# EAGLE board MP3_8xMulti_V1.0 (EAGLE 9.6.2)
AUTHORS: by Hardi, Jürgen & Dominik; DATE: 21.12.2021; LINK: https://wiki.mobaledlib.de/redirect/p502; PROJECT: 502_8xSound; VERSION: Ver. 1.0
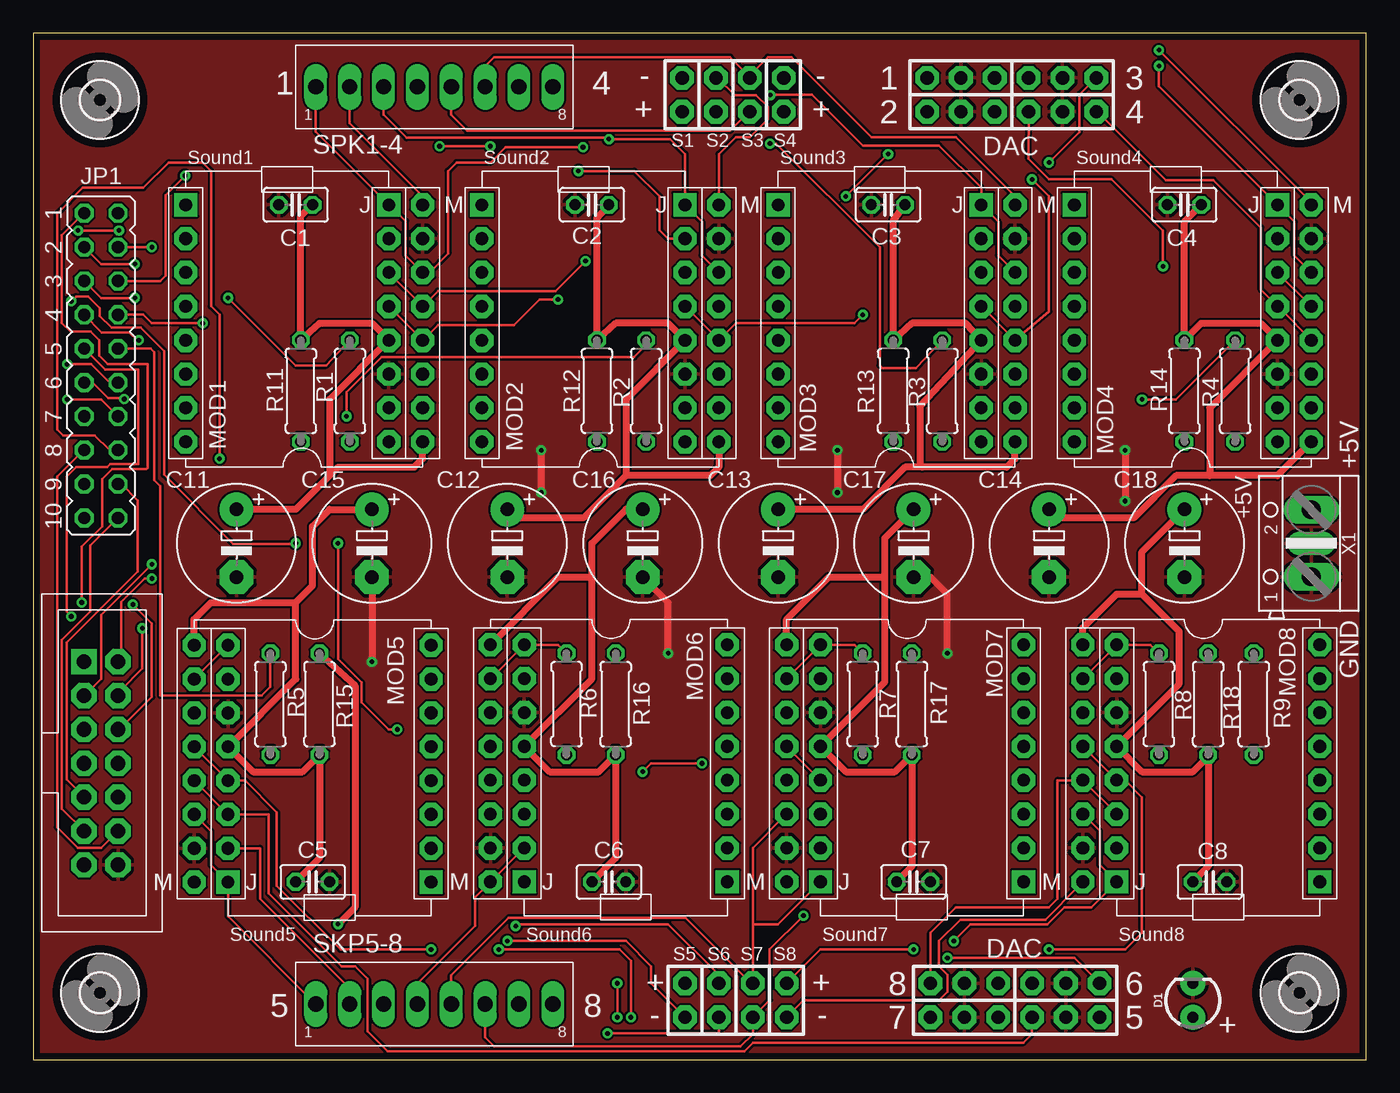
[diagram p0: board, top side]
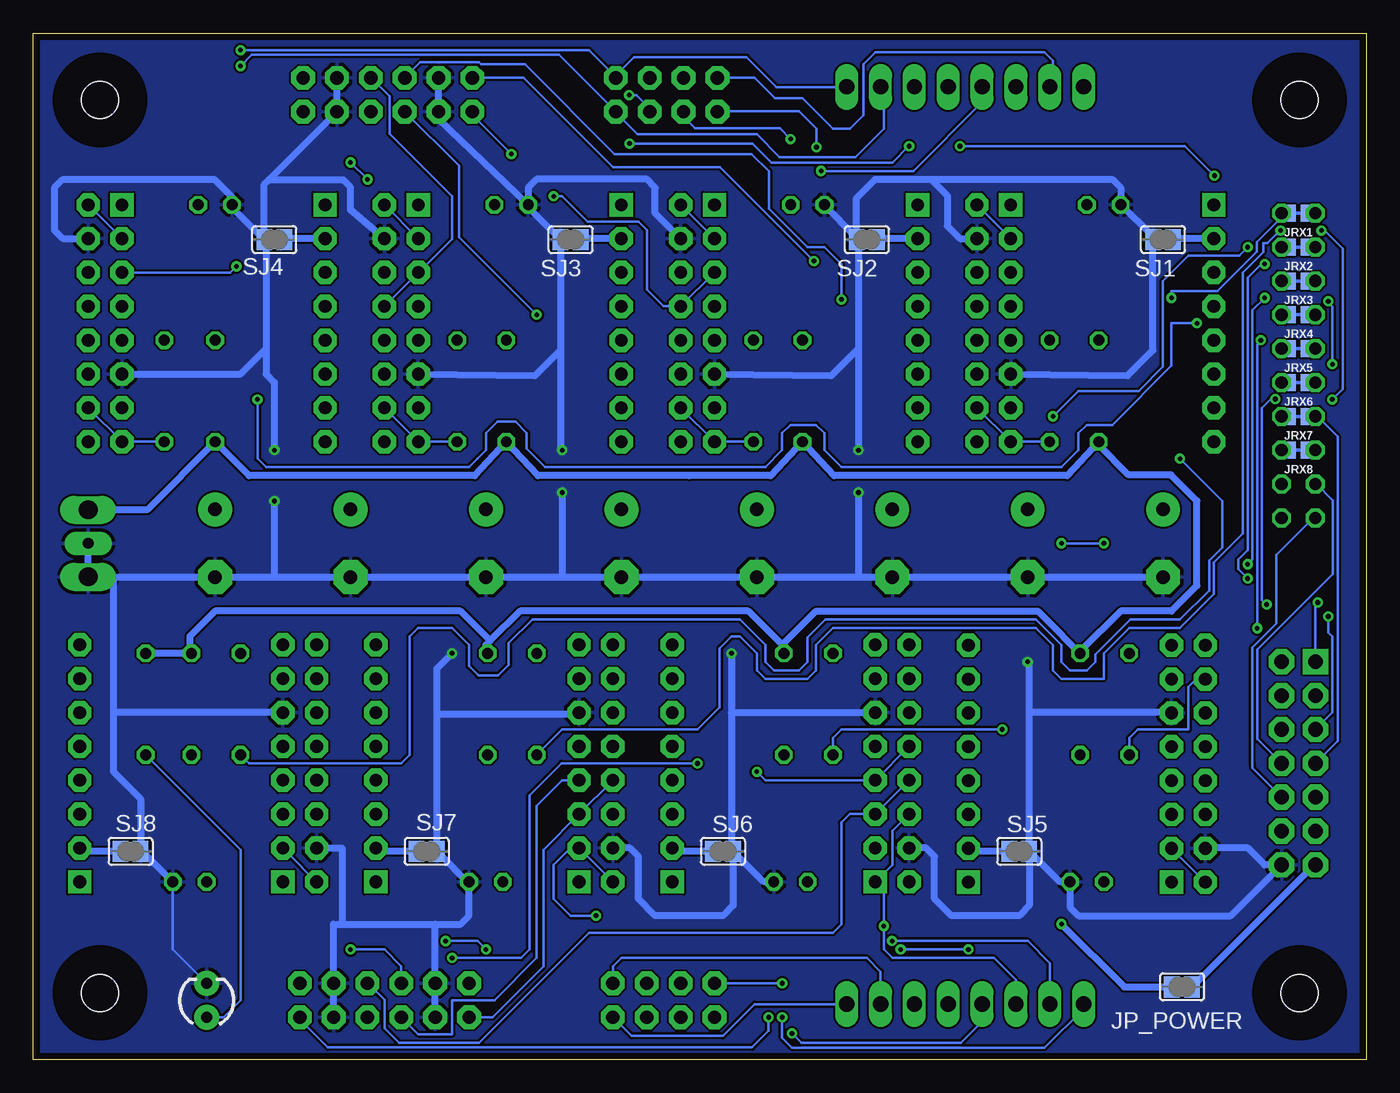
[diagram p1: board, bottom side, seen from below]

Size 100 x 77 mm. Coordinates in mm from the lower left corner, seen from the top.
Outline: 0,0 100,0 100,77 0,77 0,0
Copper layers (1*16): Top 0.035mm / dielectric 1.5mm / Bottom 0.035mm
Design rules "default *": minimum track width 8mil, minimum drill 0.35mm, track to track 6mil, track to pad 6mil, pad to pad 6mil, via to via 6mil, smd to smd 6mil, copper to edge 20mil, drill to drill 6mil, minimum pad ring 10mil, minimum via ring 8mil, stop-mask expansion 4mil, vias tented up to drill 16mil, thermal gap 10mil

## Footprints (pad centres in the part's own frame; a part is rotated, then mirrored left to right if it is on the bottom)
C025-025X050 = drill 0.813 octagon: 1 -1.27,0; 2 1.27,0
E5-8,5 = drill 1.016 pad 2.54: + -2.54,0 | drill 1.016 pad 2.54 octagon: - 2.54,0
LED_3MM = drill 0.813 pad 1.88: A -1.27,0; K 1.27,0
3XRM254 = drill 1 pad 1.778 octagon: P$1 0,6.35; P$2 0,3.81; P$3 0,1.27
2,8 = hole 2.8: 0,0
JP10Q = drill 0.914 octagon: 1 -11.43,-1.27; 2 -11.43,1.27; 3 -8.89,-1.27; 4 -8.89,1.27; 5 -6.35,-1.27; 6 -6.35,1.27; 7 -3.81,-1.27; 8 -3.81,1.27; 9 -1.27,-1.27; 10 -1.27,1.27; 11 1.27,-1.27; 12 1.27,1.27; 13 3.81,-1.27; 14 3.81,1.27; 15 6.35,-1.27; 16 6.35,1.27; 17 8.89,-1.27; 18 8.89,1.27; 19 11.43,-1.27; 20 11.43,1.27
SJ = smd 1.168 x 1.6: 1 -0.762,0; 2 0.762,0
SMT-JUMPER_2_NC_TRACE_NO-SILK = smd 0.635 x 1.27: 1 -0.508,0; 2 0.508,0
IDC14 = drill 1.1 pad 1.9 square: 1 -7.62,-1.27 | drill 1.1 pad 1.9 octagon: 2 -7.62,1.27; 3 -5.08,-1.27; 4 -5.08,1.27; 5 -2.54,-1.27; 6 -2.54,1.27; 7 0,-1.27; 8 0,1.27; 9 2.54,-1.27; 10 2.54,1.27; 11 5.08,-1.27; 12 5.08,1.27; 13 7.62,-1.27; 14 7.62,1.27
MP3-TF16P_JQ6500 = drill 0.95 pad 1.75 octagon: J_DACL 5.08,2.54; J_DACR 5.08,0; J_GND1 5.08,-5.08; J_RX 5.08,-10.16; J_SPK- 5.08,5.08; J_TX 5.08,-7.62; J_VCC 5.08,-2.54; M_DACL 7.62,0; M_DACR 7.62,-2.54; M_GND1 7.62,5.08; M_GND2 -10.16,5.08; M_RX 7.62,-7.62; M_SPK1 7.62,2.54; M_SPK2 7.62,7.62; M_TX 7.62,-5.08; M_VCC 7.62,-10.16; MUSB+ -10.16,-5.08; MUSB- -10.16,-7.62; P$3 -10.16,2.54; P$4 -10.16,0; P$5 -10.16,-2.54; P$8 -10.16,-10.16 | drill 0.95 pad 1.75 square: J_SPK+ 5.08,7.62; P$1 -10.16,7.62
0207/7 = drill 0.813 octagon: 1 -3.81,0; 2 3.81,0
DG308 = drill 1.15 pad 1.676 long: P$1 1.51,3.14; P$2 4.05,3.14; P$3 6.59,3.14; P$4 9.13,3.14; P$5 11.67,3.14; P$6 14.21,3.14; P$7 16.75,3.14; P$8 19.29,3.14
2XRM254 = drill 1 pad 1.778 octagon: P$1 0,3.81; P$2 0,1.27
AK500/2+M = drill 1.397 long: 1 -2.515,0; 2 2.515,0 | drill 0.813 pad 1.778 long: M 0,0

## Placement (x,y rotation side)
C1  100nF  [C025-025X050]  19.68,64.14 180 top
C2  100nF  [C025-025X050]  41.91,64.14 180 top
C3  100nF  [C025-025X050]  64.14,64.14 180 top
C4  100nF  [C025-025X050]  86.36,64.14 180 top
C5  100nF  [C025-025X050]  20.95,13.34 0 top
C6  100nF  [C025-025X050]  43.18,13.34 0 top
C7  100nF  [C025-025X050]  66.04,13.34 0 top
C8  100nF  [C025-025X050]  88.27,13.34 0 top
C11  470µF  [E5-8,5]  15.24,38.73 270 top
C12  470µF  [E5-8,5]  35.56,38.73 270 top
C13  470µF  [E5-8,5]  55.88,38.73 270 top
C14  470µF  [E5-8,5]  76.2,38.73 270 top
C15  470µF  [E5-8,5]  25.4,38.73 270 top
C16  470µF  [E5-8,5]  45.72,38.73 270 top
C17  470µF  [E5-8,5]  66.04,38.73 270 top
C18  470µF  [E5-8,5]  86.36,38.73 270 top
D1  [LED_3MM]  87,4.45 90 top
DAC1  3XRM254  [3XRM254]  73.41,73.66 90 top
DAC2  3XRM254  [3XRM254]  73.41,71.12 90 top
DAC3  3XRM254  [3XRM254]  81.03,73.66 90 top
DAC4  3XRM254  [3XRM254]  81.03,71.12 90 top
DAC5  3XRM254  [3XRM254]  81.28,3.17 90 top
DAC6  3XRM254  [3XRM254]  81.28,5.71 90 top
DAC7  3XRM254  [3XRM254]  73.66,3.17 90 top
DAC8  3XRM254  [3XRM254]  73.66,5.71 90 top
H1  MOUNT-HOLE2.8  [2,8]  5,5 0 top
H2  MOUNT-HOLE2.8  [2,8]  95,5 0 top
H3  MOUNT-HOLE2.8  [2,8]  5,72 0 top
H4  MOUNT-HOLE2.8  [2,8]  95,72 0 top
JP1  [JP10Q]  5.08,52.07 270 top
JP_POWER  [SJ]  13.82,5.45 180 bottom
JRX1  JUMPER-SMT_2_NC_TRACE_NO-SILK  [SMT-JUMPER_2_NC_TRACE_NO-SILK]  5.08,63.5 180 bottom
JRX2  JUMPER-SMT_2_NC_TRACE_NO-SILK  [SMT-JUMPER_2_NC_TRACE_NO-SILK]  5.08,60.96 180 bottom
JRX3  JUMPER-SMT_2_NC_TRACE_NO-SILK  [SMT-JUMPER_2_NC_TRACE_NO-SILK]  5.08,58.42 180 bottom
JRX4  JUMPER-SMT_2_NC_TRACE_NO-SILK  [SMT-JUMPER_2_NC_TRACE_NO-SILK]  5.08,55.88 180 bottom
JRX5  JUMPER-SMT_2_NC_TRACE_NO-SILK  [SMT-JUMPER_2_NC_TRACE_NO-SILK]  5.08,53.34 180 bottom
JRX6  JUMPER-SMT_2_NC_TRACE_NO-SILK  [SMT-JUMPER_2_NC_TRACE_NO-SILK]  5.08,50.8 180 bottom
JRX7  JUMPER-SMT_2_NC_TRACE_NO-SILK  [SMT-JUMPER_2_NC_TRACE_NO-SILK]  5.08,48.26 180 bottom
JRX8  JUMPER-SMT_2_NC_TRACE_NO-SILK  [SMT-JUMPER_2_NC_TRACE_NO-SILK]  5.08,45.72 180 bottom
KEY80  KEY_80  [IDC14]  5.08,22.23 270 top
MOD1  MP3-MULTI  [MP3-TF16P_JQ6500]  21.59,56.52 0 top
MOD2  MP3-MULTI  [MP3-TF16P_JQ6500]  43.81,56.52 0 top
MOD3  MP3-MULTI  [MP3-TF16P_JQ6500]  66.04,56.52 0 top
MOD4  MP3-MULTI  [MP3-TF16P_JQ6500]  88.27,56.52 0 top
MOD5  MP3-MULTI  [MP3-TF16P_JQ6500]  19.68,20.93 180 top
MOD6  MP3-MULTI  [MP3-TF16P_JQ6500]  41.91,20.95 180 top
MOD7  MP3-MULTI  [MP3-TF16P_JQ6500]  64.14,20.95 180 top
MOD8  MP3-MULTI  [MP3-TF16P_JQ6500]  86.36,20.95 180 top
R1  1K  [0207/7]  23.75,50.16 270 top
R2  1K  [0207/7]  45.97,50.16 270 top
R3  1K  [0207/7]  68.2,50.16 270 top
R4  1K  [0207/7]  90.17,50.16 270 top
R5  1K  [0207/7]  17.78,26.67 270 top
R6  1K  [0207/7]  40.01,26.67 90 top
R7  1K  [0207/7]  62.23,26.67 90 top
R8  1K  [0207/7]  84.45,26.67 90 top
R9  470R  [0207/7]  91.57,26.67 270 top
R11  1R  [0207/7]  20.07,50.16 270 top
R12  1R  [0207/7]  42.29,50.16 90 top
R13  1R  [0207/7]  64.52,50.16 90 top
R14  1R  [0207/7]  86.36,50.16 90 top
R15  1R  [0207/7]  21.46,26.67 270 top
R16  1R  [0207/7]  43.69,26.67 270 top
R17  1R  [0207/7]  65.91,26.67 270 top
R18  1R  [0207/7]  88.14,26.67 270 top
SJ1  [SJ]  15.24,61.52 0 bottom
SJ2  [SJ]  37.47,61.52 0 bottom
SJ3  [SJ]  59.69,61.52 0 bottom
SJ4  [SJ]  81.92,61.52 0 bottom
SJ5  [SJ]  26.04,15.62 180 bottom
SJ6  [SJ]  48.26,15.62 180 bottom
SJ7  [SJ]  70.48,15.62 180 bottom
SJ8  [SJ]  92.71,15.62 180 bottom
SKP5-8  4X2P-OUT  [DG308]  19.68,1.02 0 top
SPK1  2XRM254  [2XRM254]  48.68,74.93 180 top
SPK1-4  4X2P-OUT  [DG308]  19.68,69.85 0 top
SPK2  2XRM254  [2XRM254]  51.22,74.93 180 top
SPK3  2XRM254  [2XRM254]  53.75,74.93 180 top
SPK4  2XRM254  [2XRM254]  56.29,74.93 180 top
SPK5  2XRM254  [2XRM254]  48.9,1.91 0 top
SPK6  2XRM254  [2XRM254]  51.44,1.91 0 top
SPK7  2XRM254  [2XRM254]  53.98,1.91 0 top
SPK8  2XRM254  [2XRM254]  56.52,1.91 0 top
X1  AK500/2+M  [AK500/2+M]  95.89,38.73 90 top

## Library data of the parts
C1-C8 C11-C18 = rcl; SPICEPREFIX: C
D1 = SparkFun-LED; PROD_ID: DIO-08794
DAC1-DAC8 KEY80 MOD1-MOD8 SKP5-8 SPK1 SPK1-4 SPK2-SPK8 = MLL-Dominik-Hardi
H1-H4 = holes
JP1 JP_POWER SJ1-SJ8 = jumper
JRX1-JRX8 = SparkFun-Jumpers
R1-R9 R11-R18 = rcl; SPICEPREFIX: R
X1 = Arduino_fuer_LEDs_DCC_2

## Nets
+5V: JP_POWER.2 R9.1 R11.2 R12.1 R13.1 R14.1 R15.1 R16.1 R17.1 R18.1 X1.2
A1: JP1.17 KEY80.8
BUT: JP1.18 KEY80.9
D2: JP1.1 JRX1.1 KEY80.1
D7: JP1.3 JRX2.1 KEY80.2
D8: JP1.5 JRX3.1 KEY80.3
D9: JP1.7 JRX4.1 KEY80.4
D10: JP1.9 JRX5.1 KEY80.5
D11: JP1.11 JRX6.1 KEY80.6
D12: JP1.13 JRX7.1 KEY80.7
DACL_S1: DAC1.P$1 MOD1.J_DACL MOD1.M_DACL
DACL_S2: DAC2.P$1 MOD2.J_DACL MOD2.M_DACL
DACL_S3: DAC3.P$1 MOD3.J_DACL MOD3.M_DACL
DACL_S4: DAC4.P$1 MOD4.J_DACL MOD4.M_DACL
DACL_S5: DAC5.P$1 MOD5.J_DACL MOD5.M_DACL
DACL_S6: DAC6.P$1 MOD6.J_DACL MOD6.M_DACL
DACL_S7: DAC7.P$1 MOD7.J_DACL MOD7.M_DACL
DACL_S8: DAC8.P$1 MOD8.J_DACL MOD8.M_DACL
DACR_S1: DAC1.P$3 MOD1.J_DACR MOD1.M_DACR
DACR_S2: DAC2.P$3 MOD2.J_DACR MOD2.M_DACR
DACR_S3: DAC3.P$3 MOD3.J_DACR MOD3.M_DACR
DACR_S4: DAC4.P$3 MOD4.J_DACR MOD4.M_DACR
DACR_S5: DAC5.P$3 MOD5.J_DACR MOD5.M_DACR
DACR_S6: DAC6.P$3 MOD6.J_DACR MOD6.M_DACR
DACR_S7: DAC7.P$3 MOD7.J_DACR MOD7.M_DACR
DACR_S8: DAC8.P$3 MOD8.J_DACR MOD8.M_DACR
GND: C1.2 C2.2 C3.2 C4.2 C5.2 C6.2 C7.2 C8.2 C11.- C12.- C13.- C14.- C15.- C16.- C17.- C18.- D1.K DAC1.P$2 DAC2.P$2 DAC3.P$2 DAC4.P$2 DAC5.P$2 DAC6.P$2 DAC7.P$2 DAC8.P$2 KEY80.14 MOD1.J_GND1 MOD1.M_GND1 MOD2.J_GND1 MOD2.M_GND1 MOD3.J_GND1 MOD3.M_GND1 MOD4.J_GND1 MOD4.M_GND1 MOD5.J_GND1 MOD5.M_GND1 MOD6.J_GND1 MOD6.M_GND1 MOD7.J_GND1 MOD7.M_GND1 MOD8.J_GND1 MOD8.M_GND1 SJ1.1 SJ2.1 SJ3.1 SJ4.1 SJ5.1 SJ6.1 SJ7.1 SJ8.1 X1.1 X1.M
LED1: D1.A R9.2
M_GND1: MOD1.M_GND2 SJ1.2
M_GND2: MOD2.M_GND2 SJ2.2
M_GND3: MOD3.M_GND2 SJ3.2
M_GND4: MOD4.M_GND2 SJ4.2
M_GND5: MOD5.M_GND2 SJ5.2
M_GND6: MOD6.M_GND2 SJ6.2
M_GND7: MOD7.M_GND2 SJ7.2
M_GND8: MOD8.M_GND2 SJ8.2
MOD1_RX: MOD1.J_RX MOD1.M_RX R1.2
MOD1_RX1: MOD2.J_RX MOD2.M_RX R2.2
MOD1_RX2: MOD3.J_RX MOD3.M_RX R3.2
MOD1_RX3: MOD4.J_RX MOD4.M_RX R4.2
MOD1_RX4: MOD5.J_RX MOD5.M_RX R5.2
MOD1_RX5: MOD6.J_RX MOD6.M_RX R6.2
MOD1_RX6: MOD7.J_RX MOD7.M_RX R7.2
MOD1_RX7: MOD8.J_RX MOD8.M_RX R8.2
OPT-VCC: JP_POWER.1 KEY80.13
RES: JP1.19 KEY80.10
RX1: JP1.2 JRX1.2 R1.1
RX2: JP1.4 JRX2.2 R2.1
RX3: JP1.6 JRX3.2 R3.1
RX4: JP1.8 JRX4.2 R4.1
RX5: JP1.10 JRX5.2 R5.1
RX6: JP1.12 JRX6.2 R6.1
RX7: JP1.14 JRX7.2 R7.1
RX8: JP1.16 JRX8.2 R8.1
SCL: JP1.15 JRX8.1 KEY80.12
SDA: JP1.20 KEY80.11
SOUND1_VCC: C1.1 C11.+ MOD1.J_VCC MOD1.M_VCC R11.1
SOUND2_VCC: C2.1 C12.+ MOD2.J_VCC MOD2.M_VCC R12.2
SOUND3_VCC: C3.1 C13.+ MOD3.J_VCC MOD3.M_VCC R13.2
SOUND4_VCC: C4.1 C14.+ MOD4.J_VCC MOD4.M_VCC R14.2
SOUND5_VCC: C5.1 C15.+ MOD5.J_VCC MOD5.M_VCC R15.2
SOUND6_VCC: C6.1 C16.+ MOD6.J_VCC MOD6.M_VCC R16.2
SOUND7_VCC: C7.1 C17.+ MOD7.J_VCC MOD7.M_VCC R17.2
SOUND8_VCC: C8.1 C18.+ MOD8.J_VCC MOD8.M_VCC R18.2
SPK_S1+: MOD1.J_SPK+ MOD1.M_SPK1 SPK1-4.P$1 SPK1.P$1
SPK_S1-: MOD1.J_SPK- MOD1.M_SPK2 SPK1-4.P$2 SPK1.P$2
SPK_S2+: MOD2.J_SPK+ MOD2.M_SPK1 SPK1-4.P$3 SPK2.P$1
SPK_S2-: MOD2.J_SPK- MOD2.M_SPK2 SPK1-4.P$4 SPK2.P$2
SPK_S3+: MOD3.J_SPK+ MOD3.M_SPK1 SPK1-4.P$5 SPK3.P$1
SPK_S3-: MOD3.J_SPK- MOD3.M_SPK2 SPK1-4.P$6 SPK3.P$2
SPK_S4+: MOD4.J_SPK+ MOD4.M_SPK1 SPK1-4.P$7 SPK4.P$1
SPK_S4-: MOD4.J_SPK- MOD4.M_SPK2 SPK1-4.P$8 SPK4.P$2
SPK_S5+: MOD5.J_SPK+ MOD5.M_SPK1 SKP5-8.P$1 SPK5.P$1
SPK_S5-: MOD5.J_SPK- MOD5.M_SPK2 SKP5-8.P$2 SPK5.P$2
SPK_S6+: MOD6.J_SPK+ MOD6.M_SPK1 SKP5-8.P$3 SPK6.P$1
SPK_S6-: MOD6.J_SPK- MOD6.M_SPK2 SKP5-8.P$4 SPK6.P$2
SPK_S7+: MOD7.J_SPK+ MOD7.M_SPK1 SKP5-8.P$5 SPK7.P$1
SPK_S7-: MOD7.J_SPK- MOD7.M_SPK2 SKP5-8.P$6 SPK7.P$2
SPK_S8+: MOD8.J_SPK+ MOD8.M_SPK1 SKP5-8.P$7 SPK8.P$1
SPK_S8-: MOD8.J_SPK- MOD8.M_SPK2 SKP5-8.P$8 SPK8.P$2

## Tracks (layer width: path | path; a pad name or v marks a point on that pad's centre or on a via)
+5V  (via drill 0.35)
  Top 0.508: R15.1 24.13,28.07 24.13,11.43 v22.86,10.16
  Bottom 0.508: v22.86,10.16 18.15,5.45 JP_POWER.2 | 65.72,31.43 63.5,33.66 46.35,33.66 43.69,30.99 R16.1 43.69,31.24 41.27,33.66 24.64,33.66 24.07,33.08 R15.1 21.46,30.61 18.41,33.66 14.61,33.66 12.7,35.56 12.7,41.91 14.66,43.87 17.83,43.87 20.07,46.1 R11.2 22.44,43.81 39.92,43.81 R12.1 44.66,43.81 50.8,43.81 62.15,43.81 R13.1 66.89,43.81 83.82,43.81 R14.1 91.47,41.25 X1.2 | 65.72,31.43 66.04,31.11 66.04,30.61 R17.1 | 65.72,31.43 67.94,33.66 86.36,33.66 88.27,31.75 88.27,30.61 R18.1 R9.1
A1
  Bottom 0.203: JP1.17 3.73,43.2 2.49,41.96 2.49,36.45 8.18,30.76 8.18,24.05 KEY80.8
BUT
  Top 0.203: JP1.18 6.58,43.2 7.82,41.96 7.82,36.63 2.49,31.29 2.49,21.01 KEY80.9
D2  (via drill 0.35)
  Top 0.203: JP1.1 3.73,63.48 2.13,61.87 2.13,55.27 2.79,54.61 4.32,54.61 4.95,53.98 4.95,52.83 5.59,52.2 8.56,52.2 8.56,44.4 8.48,44.31 5.91,44.31 5.16,43.56 5.16,40.01 3.63,38.48 v3.63,34.29
  Bottom 0.203: JRX1.1 JP1.1 | KEY80.1 3.81,34.29 v3.63,34.29
D7  (via drill 0.35)
  Top 0.203: v8.89,36.09 8.36,36.09 6.58,34.31 6.58,30.23 KEY80.2 | v7.62,59.69 5.08,59.69 JP1.3
  Bottom 0.203: v8.89,36.09 9.6,36.8 9.6,37.52 8.89,38.23 8.89,58.67 7.87,59.69 v7.62,59.69 | JRX2.1 JP1.3
D8  (via drill 0.35)
  Top 0.203: v8.89,37.16 5.08,33.35 5.08,28.57 KEY80.3 | JP1.5 5.08,57.15 v7.62,57.15
  Bottom 0.203: v8.89,37.16 8.53,37.52 8.53,56.24 v7.62,57.15 | JRX3.1 JP1.5
D9  (via drill 0.35)
  Top 0.203: v8.18,32.36 8.18,29.34 6.58,27.74 KEY80.4 | v7.9,53.98 7.78,53.98 7.21,54.55 5.14,54.55 JP1.7
  Bottom 0.203: v7.9,53.98 8.18,53.7 v8.18,32.36 | JRX4.1 JP1.7
D10  (via drill 0.35)
  Top 0.203: v2.85,33.25 2.49,33.6 2.49,43.74 3.2,44.45 5.54,44.45 5.76,44.67 7.87,44.67 7.87,51.77 5.38,51.77 JP1.9
  Bottom 0.203: JRX5.1 JP1.9 | v2.85,33.25 2.85,32.05 2.54,31.75 2.54,26.04 KEY80.5
D11  (via drill 0.35)
  Top 0.203: v7.47,34.14 8.89,32.72 8.89,27.2 6.76,25.07 KEY80.6 | v6.81,49.56 6.81,49.63 5.61,49.63 4.45,50.8 JP1.11
  Bottom 0.203: v7.47,34.14 7.82,34.49 7.82,48.9 7.16,49.56 v6.81,49.56 | JRX6.1 JP1.11
D12
  Bottom 0.203: KEY80.7 2.13,23.9 2.13,46.76 3.63,48.26 JP1.13 JRX7.1
DACL_S1  (via drill 0.35)
  Top 0.203: v41.43,59.92 39.17,57.66 30.35,57.66 MOD1.M_DACL MOD1.J_DACL
  Bottom 0.203: v41.43,59.92 48.46,66.95 56.52,66.95 63.22,73.66 DAC1.P$1
DACL_S2  (via drill 0.35)
  Top 0.203: v60.96,64.77 v64.14,67.94
  Bottom 0.203: DAC2.P$1 67.03,71.12 67.03,70.84 v64.14,67.94 | MOD2.J_DACL MOD2.M_DACL 52.7,56.52 53.98,57.78 53.98,62.23 54.61,62.87 58.42,62.87 60.33,64.77 v60.96,64.77
DACL_S3
  Bottom 0.203: DAC3.P$1 73.28,72.29 73.28,69.47 68.58,64.77 68.58,61.57 71.09,59.05 MOD3.J_DACL MOD3.M_DACL
DACL_S4  (via drill 0.35)
  Top 0.203: v84.76,59.51 84.76,62.18 80.9,66.04 76.2,66.04 74.66,67.58 DAC4.P$1 | MOD4.M_DACL MOD4.J_DACL
  Bottom 0.203: MOD4.J_DACL 85.22,59.05 v84.76,59.51
DACL_S5
  Top 0.203: MOD5.M_DACL 14.59,18.4 | 14.59,18.4 MOD5.J_DACL | 14.59,18.4 17.65,18.4 17.65,12.47 23.14,6.99 24.13,6.99 25.07,6.04 25.07,2.13 26.57,0.64 53.34,0.64 53.98,1.27 74.3,1.27 74.93,1.91 DAC5.P$1
DACL_S6
  Bottom 0.203: DAC6.P$1 74.85,5.69 73.66,4.5 73.66,2.36 72.57,1.27 66.55,1.27 58.29,9.53 40.01,9.53 39.37,10.16 39.37,17.78 38.73,18.41 MOD6.J_DACL MOD6.M_DACL
DACL_S7
  Bottom 0.203: DAC7.P$1 65.53,3.17 61.72,6.99 61.72,15.75 MOD7.J_DACL MOD7.M_DACL
DACL_S8
  Top 0.203: MOD8.J_DACL MOD8.M_DACL 76.83,20.95 76.83,12.06 76.2,11.43 69.22,11.43 67.31,9.53 DAC8.P$1
DACR_S1  (via drill 0.35)
  Top 0.203: v39.37,57.03 37.98,57.03 36.07,55.12 30.35,55.12 MOD1.M_DACR MOD1.J_DACR
  Bottom 0.203: DAC1.P$3 70.98,74.82 66.57,74.82 66.42,74.68 63.12,74.68 56.39,67.94 46.1,67.94 44.81,66.65 44.81,63.86 41.91,60.96 40.64,60.96 39.37,59.69 v39.37,57.03
DACR_S2  (via drill 0.35)
  Top 0.203: MOD2.J_DACR MOD2.M_DACR 52.7,55.24 61.59,55.24 v62.23,55.88
  Bottom 0.203: DAC2.P$3 68.07,67.09 68.07,61.72 v62.23,55.88
DACR_S3  (via drill 0.35)
  Top 0.203: DAC3.P$3 78.47,72.41 78.47,69.58 v76.2,67.31 | v74.93,66.04 76.2,64.77 76.2,56.13 MOD3.M_DACR MOD3.J_DACR
  Bottom 0.203: v74.93,66.04 v76.2,67.31
DACR_S4
  Top 0.203: 93.52,56.36 96.01,53.87 MOD4.M_DACR | 93.52,56.36 92.1,57.78 92.1,62.43 88.54,65.99 84.96,65.99 79.83,71.12 DAC4.P$3 | 93.52,56.36 MOD4.J_DACR
DACR_S5  (via drill 0.35)
  Top 0.203: v29.84,8.26 23.04,8.26 18.26,13.03 18.26,18.54 15.88,20.93 MOD5.J_DACR MOD5.M_DACR | v34.92,8.26 43.97,8.26 44.83,7.39 v44.83,3.17
  Bottom 0.203: DAC5.P$3 80.01,3.02 77.9,0.91 46.08,0.91 44.83,2.16 v44.83,3.17 | v29.84,8.26 v34.92,8.26
DACR_S6  (via drill 0.35)
  Top 0.203: v68.58,7.62 78.11,7.62 DAC6.P$3 | v50.16,22.23 46.35,22.23 v45.72,21.59
  Bottom 0.203: v68.58,7.62 63.4,7.62 62.76,8.26 62.76,19.84 60.38,22.23 v50.16,22.23 | MOD6.M_DACR MOD6.J_DACR 45.09,20.95 v45.72,21.59
DACR_S7
  Top 0.203: MOD7.J_DACR MOD7.M_DACR
  Bottom 0.203: DAC7.P$3 71.12,1.91 68.58,1.91 68.58,4.45 65.41,4.45 62.23,7.62 62.23,19.05 60.33,20.95 MOD7.J_DACR
DACR_S8  (via drill 0.35)
  Top 0.203: v76.2,8.26 81.92,8.26 83.19,9.53 83.19,19.68 81.92,20.95 MOD8.J_DACR MOD8.M_DACR
  Bottom 0.203: DAC8.P$3 72.39,6.99 73.66,8.26 v76.2,8.26
GND  (via drill 0.35)
  Top 0.508: C15.- v25.4,29.84 | v68.58,30.48 68.58,34.92 67.31,36.2 C17.- | v38.1,45.72 v38.1,42.55 | v60.33,45.72 v60.33,42.55 | v81.92,45.72 v81.92,41.91 | C16.- 47.62,34.29 v47.62,30.48
  Bottom 0.203: D1.K 89.53,8.26 C8.2
  Bottom 0.508: 82.55,53.34 82.55,61.39 SJ4.1 | MOD3.J_GND1 62.36,51.31 60.45,53.21 | 60.45,53.21 SJ3.1 62.93,64 C3.2 | MOD2.J_GND1 40.13,51.31 38.1,53.34 | 38.1,53.34 38.1,61.39 SJ2.1 | SJ2.1 38.23,61.62 C2.2 | MOD1.J_GND1 17.91,51.31 16,53.21 SJ1.1 16,61.77 C1.2 18.41,65.41 19.05,66.04 32.64,66.04 | 69.72,25.91 SJ7.1 67.22,13.12 C7.2 67.31,10.79 67.94,10.16 69.85,10.16 | 69.72,25.91 58.99,25.91 MOD7.J_GND1 | 76.83,10.16 69.85,10.16 | 69.72,25.91 69.72,29.34 v68.58,30.48 | 93.98,26.04 93.98,21.59 91.95,19.56 SJ8.1 91.82,15.62 C8.2 | SJ5.1 25.27,26.04 | 25.27,26.04 25.27,29.72 v25.4,29.84 | DAC7.P$2 DAC8.P$2 69.85,10.16 | DAC5.P$2 DAC6.P$2 77.47,10.16 76.83,10.16 | SJ4.1 82.68,65.67 82.35,65.99 | 82.35,65.99 79.89,68.46 DAC4.P$2 DAC3.P$2 | C3.2 69.58,70.55 DAC2.P$2 DAC1.P$2 | MOD3.M_GND1 76.2,63.75 76.2,65.46 76.74,65.99 82.35,65.99 | SJ2.1 38.23,64.64 36.83,66.04 32.64,66.04 | 32.64,66.04 31.42,64.82 31.42,62.53 30.48,61.59 MOD1.M_GND1 | MOD8.M_GND1 76.83,15.88 76.83,10.16 | SJ4.1 85.09,63.93 C4.2 85.09,64.72 86.39,66.02 97.81,66.02 98.42,65.41 98.42,62.23 97.79,61.59 MOD4.M_GND1 | MOD4.J_GND1 84.45,51.44 82.55,53.34 | MOD8.J_GND1 93.98,26.04 | SJ6.1 47.5,11.56 48.26,10.79 53.34,10.79 54.61,12.06 54.61,15.24 55.24,15.88 MOD7.M_GND1 | SJ5.1 25.27,11.56 26.04,10.79 31.11,10.79 32.38,12.06 32.38,15.24 33.02,15.88 MOD6.M_GND1 | MOD5.M_GND1 12.04,15.88 8.89,15.88 7.62,14.61 KEY80.14 10.16,10.79 21.59,10.79 22.23,11.43 C5.2 22.99,13.34 SJ5.1 | MOD5.J_GND1 14.63,26.04 25.27,26.04 | v47.62,30.48 47.62,26.04 | 47.62,26.04 MOD6.J_GND1 | 47.62,26.04 47.62,15.75 SJ6.1 | MOD2.M_GND1 53.34,63.5 53.34,65.41 53.98,66.04 62.23,66.04 62.87,65.41 C3.2
  Bottom 0.508: C6.2 45.21,13.34 SJ6.1 | 93.98,36.22 86.39,36.22 C18.- 81.92,36.2 | 81.92,36.2 C14.- C17.- 60.33,36.2 | 60.33,36.2 C13.- C16.- 38.1,36.2 | 38.1,36.2 C12.- C15.- C11.- | 38.1,53.34 v38.1,45.72 | 60.45,53.21 60.45,45.85 v60.33,45.72 | v60.33,42.55 60.33,36.2 | 82.55,53.34 82.55,51.44 81.92,50.8 v81.92,45.72 | v81.92,41.91 81.92,36.2 | X1.M X1.1 93.98,36.22 | 93.98,26.04 93.98,36.22 | v38.1,42.55 38.1,36.2
  pour Bottom: 0.08,76.89 100,76.89 100,0 0.08,0
  pour Top: 0.21,76.92 100,76.92 100,0 0,0 0.13,0.81 0.13,76.84
LED1
  Bottom 0.203: D1.A 85.72,3.17 84.45,4.45 84.45,15.75 R9.2
M_GND1
  Bottom 0.508: MOD1.M_GND2 14.4,61.59 SJ1.2
M_GND2
  Bottom 0.508: MOD2.M_GND2 36.63,61.59 SJ2.2
M_GND3
  Bottom 0.508: MOD3.M_GND2 58.85,61.59 SJ3.2
M_GND4
  Bottom 0.203: SJ4.2 81.05,61.52
  Bottom 0.508: MOD4.M_GND2 80.97,61.59 81.05,61.52
M_GND5
  Bottom 0.508: SJ5.2 29.62,15.62 MOD5.M_GND2
M_GND6
  Bottom 0.508: SJ6.2 51.82,15.62 MOD6.M_GND2
M_GND7
  Bottom 0.508: SJ7.2 74.04,15.62 MOD7.M_GND2
M_GND8
  Bottom 0.508: SJ8.2 96.27,15.62 MOD8.M_GND2
MOD1_RX
  Bottom 0.203: R1.2 MOD1.J_RX MOD1.M_RX
MOD1_RX1
  Bottom 0.203: R2.2 MOD2.J_RX MOD2.M_RX
MOD1_RX2
  Bottom 0.203: MOD3.M_RX MOD3.J_RX R3.2
MOD1_RX3
  Bottom 0.203: R4.2 MOD4.J_RX MOD4.M_RX
MOD1_RX4
  Top 0.203: MOD5.J_RX MOD5.M_RX
  Bottom 0.203: MOD5.M_RX 12.72,28.55 13.34,27.94 13.34,24.77 17.14,24.77 17.78,24.13 R5.2
MOD1_RX5
  Top 0.203: MOD6.M_RX MOD6.J_RX 39.37,31.11 R6.2
MOD1_RX6
  Top 0.203: MOD7.M_RX MOD7.J_RX 61.59,31.11 R7.2
MOD1_RX7
  Top 0.203: MOD8.M_RX MOD8.J_RX 83.82,31.11 R8.2
OPT-VCC
  Bottom 0.508: JP_POWER.1 4.04,14.46 KEY80.13
RES
  Bottom 0.203: JP1.19 3.91,40.72 6.76,37.87 6.76,32.72 8.53,30.94 8.53,22.23 8.53,22.05 8.53,21.87 KEY80.10
RX1  (via drill 0.35)
  Top 0.203: v14.61,57.15 19.68,52.07 21.97,52.07 R1.1
  Bottom 0.203: JRX1.2 JP1.2 6.58,63.48 6.58,62.94 8.2,61.32 8.2,60.63 11.18,57.66 14.61,57.66 v14.61,57.15
RX2  (via drill 0.35)
  Top 0.203: v23.5,48.26 23.5,50.08 26.12,52.7 45.09,52.7 45.97,53.59 R2.1 | v8.89,60.96 JP1.4
  Bottom 0.203: v23.5,48.26 21.59,50.16 17.06,50.16 15.24,51.99 15.24,58.42 13.34,60.33 9.53,60.33 v8.89,60.96 | JRX2.2 JP1.4
RX3  (via drill 0.35)
  Top 0.203: R3.1 66.23,51.88 63.69,51.88 63.5,52.07 63.5,60.96 55.73,68.73 v55.27,68.73 | v11.38,66.32 9.93,64.87 9.93,58.83 9.53,58.42 JP1.6 | v34.29,68.53 30.53,68.53 30.48,68.58 v30.48,68.53
  Bottom 0.203: v55.27,68.73 46.05,68.73 44.63,67.31 35.56,67.31 34.29,68.58 v34.29,68.53 | v30.48,68.53 13.59,68.53 v11.38,66.32 | JRX3.2 JP1.6
RX4  (via drill 0.35)
  Top 0.203: R4.1 85.72,49.53 v83.19,49.53 | v12.7,55.24 8.89,55.24 8.26,55.88 JP1.8
  Bottom 0.203: v83.19,49.53 83.19,45.09 82.55,44.45 67.31,44.45 66.67,45.09 66.04,45.72 66.04,46.99 65.18,47.85 63.83,47.85 62.99,47.02 62.99,45.85 61.59,44.45 45.09,44.45 43.81,45.72 43.81,46.99 43.18,47.62 41.27,47.62 40.64,46.99 40.64,45.72 39.37,44.45 22.86,44.45 21.59,45.72 21.59,46.99 20.95,47.62 19.05,47.62 14.61,52.07 14.61,55.24 v12.7,55.24 | JRX4.2 JP1.8
RX5
  Top 0.203: JP1.10 8.81,53.34 9.07,53.09 9.07,43.49 9.53,43.03 9.53,27.3 17.14,27.3 17.78,27.94 R5.1
  Bottom 0.203: JRX5.2 JP1.10
RX6  (via drill 0.35)
  Top 0.203: v2.85,56.9 3.2,57.25 4.13,57.25 5,56.38 5,55.79 5.89,54.9 8.06,54.9 9.8,53.16 9.8,43.89 15.01,38.68 19.63,38.68 v19.68,38.73 | JP1.12 5.71,50.8 4.35,52.17 v2.53,52.17 | v22.86,38.73 22.86,30.07 24.65,28.28 24.65,26.79 26.67,24.77 v27.3,24.77
  Bottom 0.203: v2.85,56.9 2.85,56.82 2.53,56.51 v2.53,52.17 | R6.1 40.01,24.13 39.37,24.77 v27.3,24.77 | JRX6.2 JP1.12 | v22.86,38.73 v19.68,38.73
RX7  (via drill 0.35)
  Top 0.203: JP1.14 5.08,49.53 v2.54,49.53 | v3.35,62.2 6.22,62.2 v6.42,62.2
  Bottom 0.203: JRX7.2 JP1.14 | v2.54,49.53 1.75,50.32 1.75,60.86 3.1,62.2 v3.35,62.2 | R7.1 60.33,24.77 50.16,24.77 48.51,26.42 48.51,30.86 47.62,31.75 46.99,31.75 45.72,30.48 45.72,29.21 45.09,28.57 41.91,28.57 41.27,29.21 41.27,31.11 40.01,32.38 24.77,32.38 23.5,31.11 23.5,29.21 22.86,28.57 19.68,28.57 19.68,30.48 17.78,32.38 13.97,32.38 11.43,34.92 11.43,37.29 9.25,39.47 9.25,59.05 7.72,60.58 7.72,61.27 7.41,61.27 6.75,61.92 6.7,61.92 v6.42,62.2
RX8  (via drill 0.35)
  Top 0.203: v13.97,45.09 13.97,55.88 13.34,56.52 13.34,66.67 12.7,67.31 10.16,67.31 8.26,65.41 3.71,65.41 1.78,63.48 1.78,47.27 2.23,46.82 4.62,46.82 5.71,45.72 JP1.16
  Bottom 0.203: v13.97,45.09 10.79,41.91 10.79,38.42 11.79,37.43 11.79,35.2 13.97,33.02 17.7,33.02 20.32,30.4 20.32,29.84 20.95,29.21 22.23,29.21 22.86,29.84 22.86,31.11 24.77,33.02 40.56,33.02 41.91,31.67 41.91,29.84 42.55,29.21 44.45,29.21 45.09,29.84 45.09,31.11 46.99,33.02 62.56,33.02 64.34,31.24 64.34,29.59 65.13,28.8 66.6,28.8 67.31,29.52 67.31,31.11 68.58,32.38 71.12,32.38 71.75,31.75 71.75,22.86 72.39,22.23 83.82,22.23 R8.1 | JRX8.2 JP1.16
SCL
  Top 0.203: JP1.15 3.73,45.7 1.78,43.74 1.78,17.42 3.33,15.88 5.08,15.88 KEY80.12
  Bottom 0.203: JRX8.1 JP1.15
SDA
  Top 0.203: JP1.20 6.4,40.72 4.27,38.58 4.27,33.6 2.13,31.47 2.13,18.82 KEY80.11
SOUND1_VCC
  Top 0.508: C1.1 20.07,63.3 R11.1 21.46,55.24 25.4,55.24 MOD1.J_VCC 22.23,49.53 22.23,43.81 | 22.23,43.81 19.68,41.27 C11.+ | 22.23,43.81 22.86,44.45 28.57,44.45 29.21,45.09 MOD1.M_VCC
SOUND2_VCC
  Top 0.508: C2.1 42.29,63.14 R12.2 43.69,55.24 47.62,55.24 MOD2.J_VCC 44.45,49.53 44.45,43.81 | MOD2.M_VCC 51.44,44.45 50.8,43.81 44.45,43.81 | 44.45,43.81 41.27,40.64 36.2,40.64 C12.+
SOUND3_VCC
  Top 0.508: C3.1 64.52,62.94 R13.2 65.91,55.24 69.94,55.24 MOD3.J_VCC 66.52,49.04 66.52,44.61 66.67,44.45 | MOD3.M_VCC 73.66,45.09 73.03,44.45 66.67,44.45 | C13.+ 62.23,41.27 65.41,44.45 66.67,44.45
SOUND4_VCC
  Top 0.508: C4.1 86.36,62.87 R14.2 87.63,55.24 92.08,55.24 MOD4.J_VCC 88.27,48.9 88.27,43.81 | 88.27,43.81 93.34,43.81 MOD4.M_VCC | 88.27,43.81 85.72,43.81 82.55,40.64 76.83,40.64 C14.+
SOUND5_VCC
  Top 0.508: MOD5.M_VCC 12.06,33.02 13.34,34.29 19.68,34.29 | 19.68,34.29 19.68,28.55 MOD5.J_VCC 16.48,21.59 20.19,21.59 R15.2 21.46,15.11 C5.1 | 19.68,34.29 20.95,35.56 20.95,40.01 22.23,41.27 C15.+
SOUND6_VCC
  Top 0.508: MOD6.M_VCC 39.37,36.2 41.91,36.2 | 41.91,36.2 41.91,28.57 MOD6.J_VCC 38.73,21.59 42.42,21.59 R16.2 43.69,15.11 C6.1 | 41.91,36.2 41.91,38.73 44.45,41.27 C16.+
SOUND7_VCC
  Top 0.508: MOD7.M_VCC 56.52,33.02 59.69,36.2 63.88,36.2 | 63.88,36.2 63.88,28.32 MOD7.J_VCC 60.96,21.59 64.64,21.59 R17.2 65.91,14.48 C7.1 | 63.88,36.2 63.88,39.12 C17.+
SOUND8_VCC
  Top 0.508: C8.1 88.14,14.48 R18.2 88.14,22.73 87,21.59 83.19,21.59 MOD8.J_VCC 85.98,28.19 85.98,32.13 83.19,34.92 | C18.+ 83.19,38.1 83.19,34.92 | MOD8.M_VCC 78.74,32.38 81.28,34.92 83.19,34.92
SPK_S1+  (via drill 0.35)
  Top 0.203: v41.25,68.45 35.43,68.45 34.29,67.31 31.75,67.31 31.11,66.67 31.11,60.45 29.72,59.05 MOD1.M_SPK1 27.94,60.33 27.94,62.92 26.72,64.14 MOD1.J_SPK+ 21.2,69.61 SPK1-4.P$1
  Bottom 0.203: v41.25,68.45 41.25,69.85 42.57,71.17 48.64,71.17 SPK1.P$1
SPK_S1-
  Top 0.203: SPK1-4.P$2 23.73,70.25 29.21,64.77 MOD1.M_SPK2
  Bottom 0.203: SPK1.P$2 45.88,73.66 44.36,72.14 42.29,72.14 40.01,69.85 38.73,69.85 37.72,70.87 37.72,74.68 36.83,75.56 24.13,75.56 23.5,74.93 23.5,73.23 SPK1-4.P$2 | MOD1.J_SPK- 27.94,62.87 MOD1.M_SPK2
SPK_S2+  (via drill 0.35)
  Top 0.203: MOD2.M_SPK1 50.16,60.33 50.16,62.87 MOD2.J_SPK+ 48.9,67.94 47.78,69.06 v43.18,69.06 43.24,69.13 43.2,69.16 27.99,69.16 26.27,70.88 SPK1-4.P$3
  Bottom 0.203: SPK2.P$1 51.22,70.75 50.34,69.88 43.99,69.88 v43.18,69.06
SPK_S2-  (via drill 0.35)
  Top 0.203: SPK2.P$2 51.38,73.61 52.63,72.36 54.23,72.36 55.12,71.48 55.12,70.56 53.77,69.22 52.7,69.22 51.44,67.94 MOD2.M_SPK2 | v40.89,66.67 45.09,66.67 46.99,64.77 46.99,62.23 47.62,61.59 MOD2.J_SPK-
  Bottom 0.203: v40.89,66.67 33.96,66.67 28.82,71.82 SPK1-4.P$4 | MOD2.J_SPK- MOD2.M_SPK2
SPK_S3+  (via drill 0.35)
  Top 0.203: SPK3.P$1 53.7,71.12 52.27,69.7 32.54,69.7 31.36,70.88 SPK1-4.P$5 | MOD3.M_SPK1 72.39,60.33 72.39,62.87 MOD3.J_SPK+ 71.12,65.41 67.94,68.58 62.23,68.58 58.42,72.39 55.32,72.39 v55.3,72.36
  Bottom 0.203: v55.3,72.36 54.76,72.36 53.7,71.3 SPK3.P$1
SPK_S3-
  Top 0.203: 53.7,73.79 52.27,75.21 34.57,75.21 33.66,74.3 33.66,73.23 SPK1-4.P$6 | 53.7,73.79 55.12,75.21 56.9,75.21 62.89,69.22 69.22,69.22 73.66,64.77 MOD3.M_SPK2 | 53.7,73.79 SPK3.P$2
  Bottom 0.203: MOD3.J_SPK- MOD3.M_SPK2
SPK_S4+  (via drill 0.35)
  Top 0.203: MOD4.M_SPK1 94.61,60.33 94.61,62.87 MOD4.J_SPK+ 84.45,73.03 v84.45,74.55
  Bottom 0.203: SPK1-4.P$7 36.2,72.75 36.2,69.85 38.33,67.72 44.02,67.72 45.72,69.42 54.66,69.42 56.29,71.05 SPK4.P$1 60.56,75.39 83.62,75.39 v84.45,74.55
SPK_S4-  (via drill 0.35)
  Top 0.203: v84.45,75.74 95.89,64.31 MOD4.M_SPK2
  Bottom 0.203: SPK1-4.P$8 38.99,72.97 44.25,72.97 46.48,75.21 54.94,75.21 56.29,73.86 SPK4.P$2 56.29,73.72 58.32,75.74 v84.45,75.74 | MOD4.J_SPK- MOD4.M_SPK2
SPK_S5+  (via drill 0.35)
  Top 0.203: SKP5-8.P$1 14.61,10.75 MOD5.J_SPK+ 13.34,14.58 13.34,17.12 MOD5.M_SPK1 | v43.81,5.71 v43.81,3.17
  Bottom 0.203: SKP5-8.P$1 21.2,3.82 24.13,0.89 43.08,0.89 43.81,1.63 v43.81,3.17 | v43.81,5.71 SPK5.P$1
SPK_S5-  (via drill 0.35)
  Top 0.203: MOD5.J_SPK- 17,15.85 17,12.06 23.73,5.33 SKP5-8.P$2 | SPK5.P$2 46.35,5.71 46.35,6.99 44.45,8.89 44.44,8.9 v35.57,8.9
  Bottom 0.203: MOD5.J_SPK- MOD5.M_SPK2 | SKP5-8.P$2 23.73,7.22 25.4,8.89 v35.56,8.89 v35.57,8.9
SPK_S6+  (via drill 0.35)
  Top 0.203: SPK6.P$1 51.44,6.35 47.62,10.16 36.2,10.16 v36.2,10.01
  Bottom 0.203: SKP5-8.P$3 26.29,4.17 26.29,5.97 27.94,7.62 35.56,7.62 36.2,8.26 36.2,9.52 36.2,9.53 v36.2,10.01 36.2,12.7 MOD6.J_SPK+ 35.56,14.61 35.56,17.14 MOD6.M_SPK1
SPK_S6-  (via drill 0.35)
  Top 0.203: SKP5-8.P$4 28.78,4.19 28.78,5.69 33.13,10.05 33.13,12.18 MOD6.M_SPK2 MOD6.J_SPK- | SPK6.P$2 51.44,1.98 43.1,1.98 v43.08,1.96
  Bottom 0.203: v43.08,1.96 42.37,1.25 30.4,1.25 28.78,2.87 28.78,4.12 SKP5-8.P$4
SPK_S7+
  Top 0.203: SKP5-8.P$5 31.36,6.34 35.66,10.64 48.92,10.64 53.7,5.87 SPK7.P$1 53.98,10.16 | 53.98,10.16 53.98,15.88 MOD7.M_SPK1 | MOD7.J_SPK+ 55.88,10.16 53.98,10.16
SPK_S7-  (via drill 0.35)
  Top 0.203: v57.78,10.79 55.24,8.26 55.24,4.45 SPK7.P$2 53.98,1.91 53.06,0.99 47.62,0.99 43.18,0.99 34.57,0.99 33.9,1.67 SKP5-8.P$6
  Bottom 0.203: v57.78,10.79 59.69,10.79 60.96,12.06 60.96,14.61 59.69,15.88 MOD7.J_SPK- MOD7.M_SPK2
SPK_S8+  (via drill 0.35)
  Top 0.203: MOD8.M_SPK1 80.01,17.14 80.01,14.61 MOD8.J_SPK+ 79.38,11.43 77.36,11.43 76.07,10.13 70.31,10.13 v69.06,8.89 | SPK8.P$1 59.05,8.26 v66.04,8.26
  Bottom 0.203: SPK8.P$1 56.52,6.99 55.88,7.62 37.47,7.62 36.44,6.59 SKP5-8.P$7 | v66.04,8.26 66.67,8.89 v69.06,8.89
SPK_S8-
  Top 0.203: MOD8.M_SPK2 78.41,12.98 75.92,10.49 69.55,10.49 67.94,8.89 67.94,6.99 68.58,6.35 68.58,5.08 67.94,4.45 57.78,4.45 SPK8.P$2
  Bottom 0.203: MOD8.M_SPK2 78.59,13.16 81.08,15.65 MOD8.J_SPK- | SPK8.P$2 55.12,1.78 48.26,1.78 45.88,4.16 SKP5-8.P$8

## Text on the board
tPlace: +5V | GND
tNames: - | - | 1 | 3 | 1 | 4 | + | + | 2 | 4 | Sound1 | Sound2 | S1 | S2 | S3 | S4 | Sound3 | DAC | Sound4 | - | +5V | Sound5 | Sound6 | Sound7 | Sound8 | DAC | S5 | S6 | S7 | S8 | + | + | 8 | 6 | 5 | 8 | - | - | 7 | 5 | +
201bmp: C:/Users/Jürgen/Documents/Arduino/MobaLedLib_Docu.git/Platinen/MLL_IconBW5.bmp